# Altium PCB BYS_PCB1_V2.PcbDoc
Units mm, origin at the board's own origin, x right, y up, seen from the top; angles counter-clockwise.
Board outline 76.5 x 95 mm, 2 copper layers (Top Layer, Bottom Layer), stack 1.671 mm thick; 27 components, 35 nets, 119 pads, 551 vias.
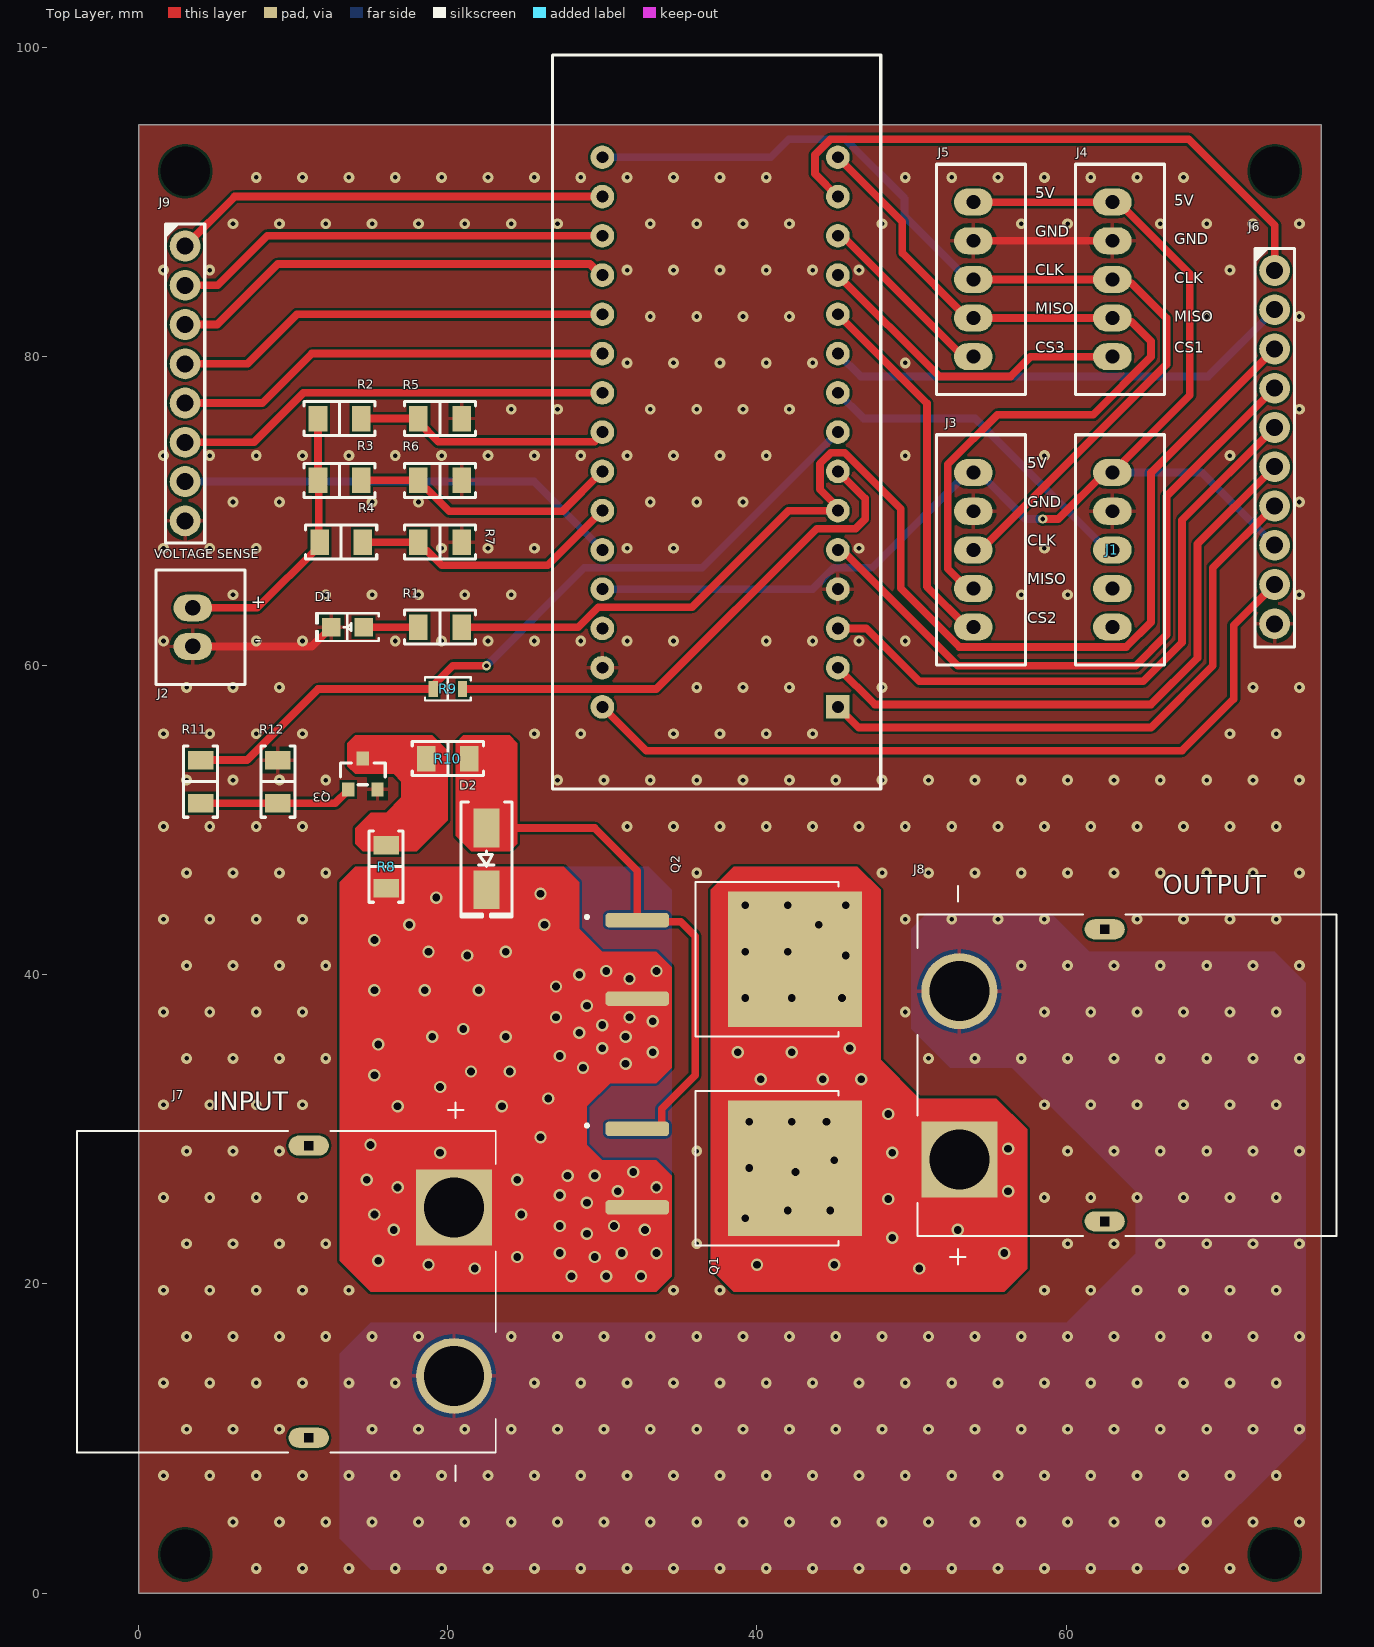
[diagram p0: Top Layer view]
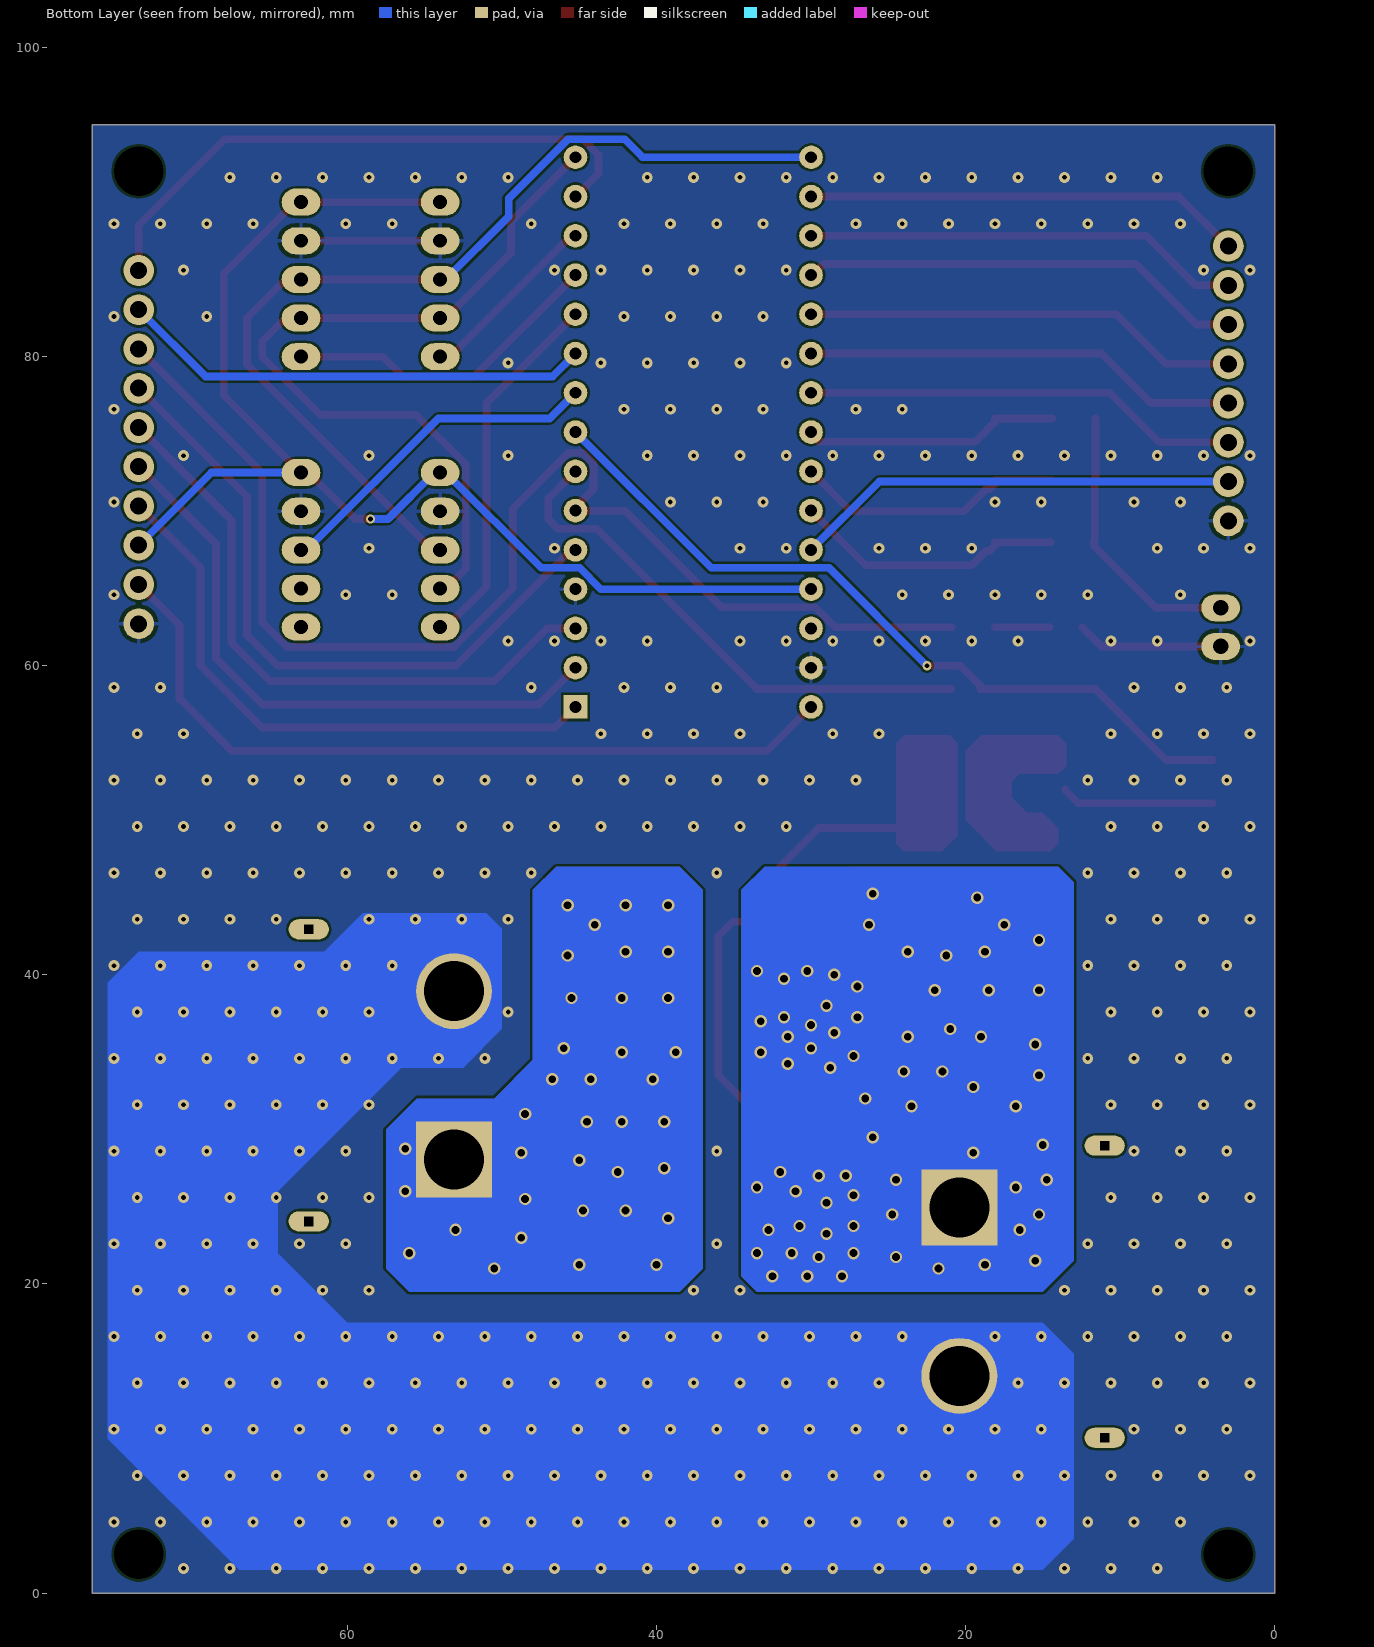
[diagram p1: Bottom Layer view, seen from below]
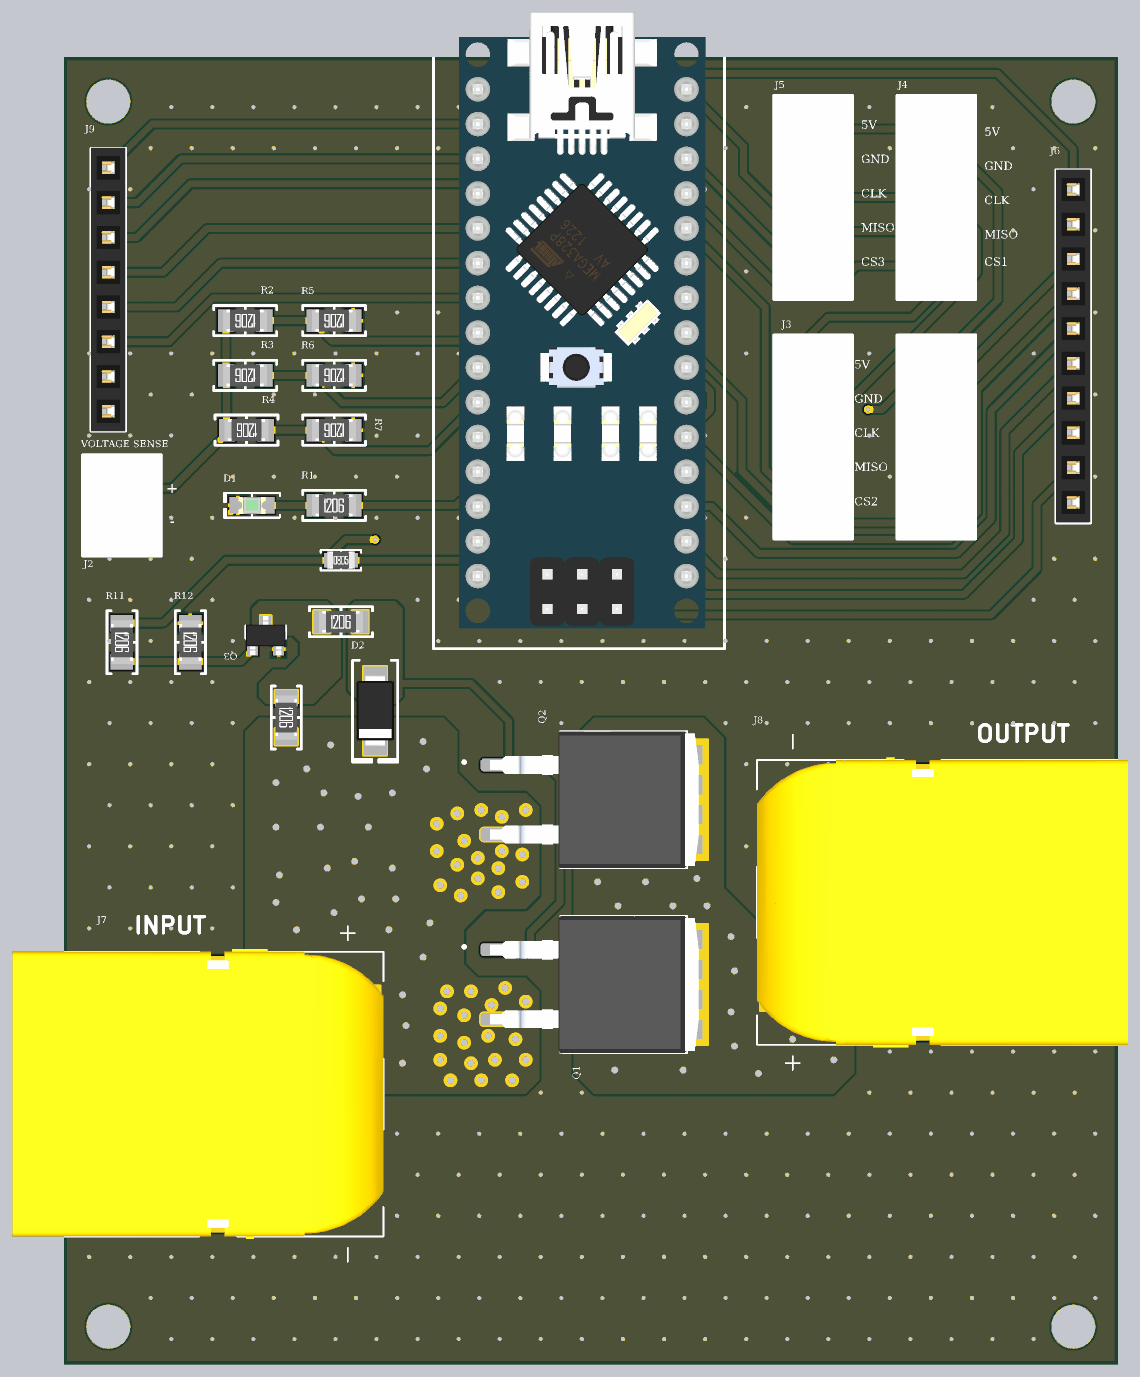
[diagram p2: 3D render of the assembled board from above, using the file's embedded part models]

## Layer stack, top to bottom
Top Solder: solder mask 0.0102, Solder Resist, Dk 3.5
Top Layer: signal copper 0.0356
Dielectric 1: dielectric 1.6, FR-4, Dk 4.8
Bottom Layer: signal copper 0.0356
Bottom Solder: solder mask 0.0102, Solder Resist, Dk 3.5

## Board outline
0,0 0,95 76.5,95 76.5,0

## Design rules (kind name [scope] priority, off if disabled: settings)
Clearance [All] p1: gap=0.152 ignorepadtopadclearanceinfootprint=FALSE
PolygonConnect [All] p1: connectstyle=Relief reliefconductorwidth=0.254 reliefentries=4 polygonreliefangle="90 Angle" airgapwidth=0.254
RoutingVias [All] p1: holewidth=0.3 width=0.6 viastyle="Through Hole" minholewidth=0.3 minwidth=0.4 maxholewidth=1.2 maxwidth=1.2
SolderMaskExpansion [All] p1: expansion=0.102 istentingtop=FALSE
SupplyNets "Schematic Supply Nets_4" [InNet('BAT-')] p1: voltage=0.000
SupplyNets "Schematic Supply Nets_2" [InNet('BAT_SENSE_+')] p2: voltage=0.000
SupplyNets "Schematic Supply Nets" [InNet('+5')] p3: voltage=0.000
Width [All] p1: maxlimit=1 minlimit=0.152 preferedwidth=0.5
30 further rules are at their usual default settings.

## Components (designator, comment, footprint, x,y, rotation, side; value= is the part's Value field where it differs from the comment)
D1 "Green" "LED 0805_2012 GREEN" 13.5,62.5 r180 top
D2 "SMAZ15-TP" "DO214AC SMA" 22.5,47.5 r270 top
IC1 "ArduinoNano" ArduinoNano_3D 46.764,53.276 r90 top
J1 "B5B-XH-A(LF)(SN)" "JST XH B5B-XH-A" 63,67.5 r90 top
J2 "B2B-XH-A(LF)(SN)" "JST XH B2B-XH-A" 3.5,62.5 r90 top
J3 "B5B-XH-A(LF)(SN)" "JST XH B5B-XH-A" 54,67.5 r90 top
J4 "B5B-XH-A(LF)(SN)" "JST XH B5B-XH-A" 63,85 r90 top
J5 "B5B-XH-A(LF)(SN)" "JST XH B5B-XH-A" 54,85 r90 top
J6 "M20-7821042" "HARWIN M20-7821045" 73.5,74.15 r0 top
J7 "SMT XT90 CONNECTOR" XT90_PW-M 11,19.5 r270 top
J8 "SMT XT90 CONNECTOR" XT90_PW-M 62.5,33.5 r90 top
J9 "M20-7820842" "HARWIN M20-7820845" 3,78.27 r0 top
Q1 "PMOS" TO-263-3-2 38.5,27.5 r0 top
Q2 "PMOS" TO-263-3-2 38.5,41 r0 top
Q3 "ZXTN25060BFHTA" "DIODES SOT-23-3" 14.5,53 r90 top
R1 "330 ohm" "RES 1206_3216" 19.5,62.5 r0 top value="0 Ohms"
R2 "0 Ohms" "RES 1206_3216" 13,76 r180 top
R3 "0 Ohms" "RES 1206_3216" 13,72 r180 top
R4 "0 Ohms" "RES 1206_3216" 13.1,68 r180 top
R5 "0 Ohms" "RES 1206_3216" 19.5,76 r180 top
R6 "0 Ohms" "RES 1206_3216" 19.5,72 r180 top
R7 "0 Ohms" "RES 1206_3216" 19.5,68 r180 top
R8 "22 kOhms" "RES 1206_3216" 16,47 r270 top
R9 "0 Ohms" "YAGEO RES RK73 RS73 SG73 0805_2012" 20,58.5 r0 top
R10 "100 Ohms" "RES 1206_3216" 20,54 r0 top
R11 "10 kOhms" "RES 1206_3216" 4,52.5 r270 top
R12 "10 kOhms" "RES 1206_3216" 9,52.5 r270 top

## Footprints (in the part's own frame and the unit in brackets; to place one, negate y for a bottom-side part, rotate by r counter-clockwise, add the part's x,y. Pads: shape width x height; smd on the part's side, far side on the other; paste and mask are expansions set on the pad)
ArduinoNano_3D [mil]
  rect 60x60 hole 30: 0(160,60)
  round 60 hole 30: 1(260,60) 2(360,60) 3(460,60) 4(560,60) 5(660,60) 6(760,60) 7(860,60) 8(960,60) 9(1060,60) 10(1160,60) 11(1260,60) 12(1360,60) 13(1460,60) 14(1560,60) 15(1560,660) 16(1460,660) 17(1360,660) 18(1260,660) 19(1160,660) 20(1060,660) 21(960,660) 22(860,660) 23(760,660) 24(660,660) 25(560,660) 26(460,660) 27(360,660) 28(260,660) 29(160,660)
  silkscreen extent -49,-49 1821,787, body extent 10,6 1781,714, height 496
"DIODES SOT-23-3" [mm] "SOT23, 3-Leads, Body 2.90x2.40mm, Pitch 0.95mm, IPC Medium Density"
  rect 0.9x0.8 smd: 1(-1,0.95) 2(-1,-0.95) 3(1,0)
  silkscreen extent -0.7,-1.45 0.7,1.45, body extent -1.41,-1.45 1.41,1.45, height 1.5
"DO214AC SMA" [mm] "Molded Diode, 2-Leads, Body 4.30x2.60mm, IPC Medium Density"
  rect 2.5x1.7 smd: 1(-2,0) 2(2,0)
  silkscreen extent -3.68,-1.65 3.75,1.65, body extent -2.6,-1.37 2.6,1.37, height 2.4
"HARWIN M20-7820845" [mm] "2.54mm DIL PC TAIL PIN HEADER ASSEMBLY"
  round 2 hole 1.1: 1(0,8.89) 2(0,6.35) 3(0,3.81) 4(0,1.27) 5(0,-1.27) 6(0,-3.81) 7(0,-6.35) 8(0,-8.89)
  silkscreen extent -1.27,-10.33 1.27,10.35, body extent -1.25,-10.36 1.25,10.36, height 8.5
"HARWIN M20-7821045" [mm] "2.54mm DIL PC TAIL PIN HEADER ASSEMBLY"
  round 2 hole 1.1: 1(0,11.43) 2(0,8.89) 3(0,6.35) 4(0,3.81) 5(0,1.27) 6(0,-1.27) 7(0,-3.81) 8(0,-6.35) 9(0,-8.89) 10(0,-11.43)
  silkscreen extent -1.27,-12.93 1.27,12.89, body extent -1.25,-12.9 1.25,12.9, height 8.5
"JST XH B2B-XH-A" [mm]
  oval 1.75x2.5 hole 1: 1(-1.25,0) 2(1.25,0)
  silkscreen extent -3.7,-3.38 3.7,2.38, body extent -3.7,-3.38 3.7,2.38, height 7
"JST XH B5B-XH-A" [mm]
  oval 1.75x2.5 hole 0.9: 1(-5,0) 2(-2.5,0) 3(0,0) 4(2.5,0) 5(5,0)
  silkscreen extent -7.45,-3.38 7.45,2.38, body extent -7.45,-3.38 7.45,2.38, height 7
"LED 0805_2012 GREEN" [mm] "Chip Diode, 2-Leads, Body 2.00x1.25mm, IPC Medium Density"
  rect 1.2x1.2 smd: 1(-1.05,0) 2(1.05,0)
  silkscreen extent -2.03,-0.9 2.03,0.9, body extent -1,-0.62 1,0.63, height 0.9
"RES 1206_3216" [mm] "Chip Resistor, 2-Leads, Body 3.13x1.55mm, IPC Medium Density"
  rect 1.2x1.65 smd: 1(-1.4,0) 2(1.4,0)
  silkscreen extent -2.3,-1.1 2.3,1.1, body extent -1.6,-0.8 1.6,0.8, height 0.6
TO-263-3-2 [mm]
  rrect50% 4.12x0.94 smd: 1(-6.24,2.54) 2(-6.24,-2.54)
  rect 8.68x8.77 smd paste-5: 3(3.96,0)
  silkscreen extent -9.6,-5 6.79,5, body extent -7.63,-5 7.63,5, height 4.5
XT90_PW-M [mm]
  round 4.916 hole 3.9: N(5.45,9.4)
  rect 4.916x4.916 / inner round 4.916 / far side rect 4.916x4.916 hole 3.9: P(-5.45,9.4)
  oval 1.3x2.6 hole 0.6 square: S1(-9.45,0) S2(9.45,0)
  silkscreen extent -12.25,-15 12.25,12.1, body extent -10.6,-15 10.6,12.1, height 10.3
"YAGEO RES RK73 RS73 SG73 0805_2012" [mm] "Chip Resistor, 2-Leads, Body 2.00x1.25mm"
  rect 0.6x1.05 smd: 1(-0.95,0) 2(0.95,0)
  silkscreen extent -1.48,-0.75 1.48,0.75, body extent -1,-0.62 1,0.63, height 0.6

## Part data
D1: library part 597-5311-407NF, "LED GREEN DIFFUSED 0805 SMD", Current - Test=20mA, Device Package="0805 (2012 Metric)", JLCPCB Part Number=C2297, Lens Color=White, manufacturer=Dialight, Millicandela Rating=16mcd, Supplier Device Package=0805, Supplier Part Number 1=350-597-5311-407NFCT-ND, Voltage - Forward (Vf) (Typ)=2.15V, Color=Green, componentlink1description=Datasheet, componentlink1url=https://s3-us-west-2.amazonaws.com/catsy.557/C18701.pdf, componentlink2description="DigiKey Link", componentlink2url=https://www.digikey.com/en/products/detail/dialight/597-5311-407NF/21710538, Height (Max)=0.93mm, lastupdated="3.06.2024 20:00:23", Lens Size="1.30mm x 1.25mm", Lens Style="Rectangle with Flat Top", Lens Transparency=Diffused, Lifecycle Status=Active, Minimum Order=1, Mounting Type="Surface Mount", Package / Case="0805 (2012 Metric)", packaging=TapeAndReel, Part Number=597-5311-407NF, partid=1475, price=0.08, series=597, Size / Dimension="2.00mm L x 1.25mm W", Supplier 1=DigiKey, Viewing Angle=140°, Wavelength - Dominant=562nm
D2: "DIODE ZENER 15V 1W DO214AC", Current - Reverse Leakage @ Vr="1 µA @ 11.4 V", JLCPCB Part Number=C110524, manufacturer="Micro Commercial Co", Operating Temperature="-65°C ~ 150°C", Package / Case="DO-214AC, SMA", Power - Max="1 W", Supplier Device Package="DO-214AC (SMAJ)", Supplier Part Number 1=SMAZ15-TPMSCT-ND, Tolerance=±5%, Voltage - Forward (Vf) (Max) @ If="1.2 V @ 200 mA", Voltage - Zener (Nom) (Vz)="15 V", componentlink1description=Datasheet, componentlink1url=https://www.mccsemi.com/pdf/Products/SMAZ5V1%20-%20SMAZ39(DO-214AC).pdf, componentlink2description="DigiKey Link", componentlink2url=https://www.digikey.com/en/products/detail/micro-commercial-co/SMAZ15-TP/1793256, lastupdated="3.06.2024 19:55:30", Lifecycle Status=Active, Minimum Order=1, Mounting Type="Surface Mount", packaging=TapeAndReel, Part Number=SMAZ15-TP, Part Status=Active, partid=1156, price=0.05, series=-, Supplier 1=DigiKey, Impedance (Max) (Zzt)="10 Ohms"
IC1: "ArduinoNano 3D"
J1 J3 J4 J5: "CONN HEADER VERT 5POS 2.5MM", Current Rating (Amps)=3A, JLCPCB Part Number=C157991, manufacturer="JST Sales America Inc.", Material Flammability Rating="UL94 V-0", Operating Temperature="-25°C ~ 85°C", Supplier Part Number 1=455-2270-ND, Voltage Rating=250V, Insulation Color=Natural, componentlink1description=Datasheet, componentlink1url=http://www.jst-mfg.com/product/pdf/eng/eXH.pdf, componentlink2description="DigiKey Link", componentlink2url=http://digikey.com/product-detail/en/jst-sales-america-inc/B5B-XH-A-LF-SN/455-2270-ND/1530483, Connector Type=Header, Contact Finish - Mating=Tin, Contact Finish - Post=Tin, Contact Length - Post="0.134\" (3.40mm)", Contact Material=Brass, Contact Shape=Square, Contact Type="Male Pin", Fastening Type="Detent Lock", lastupdated="12.01.2020 23:46:46", Lifecycle Status=Active, Minimum Order=1, Mounting Type="Through Hole", Number of Positions=5, Number of Positions Loaded=All, Number of Rows=1, packaging=Bulk, Part Number=B5B-XH-A(LF)(SN), Part Status=Active, partid=70, Pitch - Mating="0.098\" (2.50mm)", price=0.25, series=XH, Shrouding="Shrouded - 4 Wall", Style="Board to Cable/Wire", Supplier 1=DigiKey, Termination="Press-Fit, Solder", Insulation Height="0.276\" (7.00mm)", Insulation Material="Polyamide (PA66), Nylon 6/6"
J2: "CONN HEADER VERT 2POS 2.5MM", Current Rating (Amps)=3A, JLCPCB Part Number=C2908600, manufacturer="JST Sales America Inc.", Material Flammability Rating="UL94 V-0", Operating Temperature="-25°C ~ 85°C", Supplier Part Number 1=455-2247-ND, Voltage Rating=250V, Insulation Color=Natural, componentlink1description=Datasheet, componentlink1url=http://www.jst-mfg.com/product/pdf/eng/eXH.pdf, componentlink2description="DigiKey Link", componentlink2url=http://digikey.com/product-detail/en/jst-sales-america-inc/B2B-XH-A-LF-SN/455-2247-ND/1651045, Connector Type=Header, Contact Finish - Mating=Tin, Contact Finish - Post=Tin, Contact Length - Post="0.134\" (3.40mm)", Contact Material=Brass, Contact Shape=Square, Contact Type="Male Pin", Fastening Type="Detent Lock", lastupdated="12.01.2020 23:46:08", Lifecycle Status=Active, Minimum Order=1, Mounting Type="Through Hole", Number of Positions=2, Number of Positions Loaded=All, Number of Rows=1, packaging=Bulk, Part Number=B2B-XH-A(LF)(SN), Part Status=Active, partid=67, Pitch - Mating="0.098\" (2.50mm)", price=0.15, series=XH, Shrouding="Shrouded - 4 Wall", Style="Board to Cable/Wire", Supplier 1=DigiKey, Termination="Press-Fit, Solder", Insulation Height="0.276\" (7.00mm)", Insulation Material="Polyamide (PA66), Nylon 6/6"
J6: "CONN RCPT 10POS 0.1 GOLD PCB", Current Rating (Amps)=3A, manufacturer="Harwin Inc.", Material Flammability Rating="UL94 V-0", Operating Temperature="-40°C ~ 105°C", Supplier Part Number 1=952-1846-ND, Insulation Color=Black, componentlink1description=Datasheet, componentlink1url=https://cdn.harwin.com/pdfs/Harwin_PC_Connectors_M20.pdf, componentlink2description="DigiKey Link", componentlink2url=http://digikey.com/product-detail/en/harwin-inc/M20-7821042/952-1846-ND/3727813, Connector Type=Receptacle, Contact Finish - Mating=Gold, Contact Finish - Post=Tin, Contact Finish Thickness - Mating=Flash, Contact Length - Post="0.118\" (3.00mm)", Contact Type="Female Socket", Fastening Type=Push-Pull, lastupdated="21.09.2022 18:59:03", Lifecycle Status=Active, Mated Stacking Heights="11.04mm, 12.63mm", Minimum Order=1, Mounting Type="Through Hole", Number of Positions=10, Number of Positions Loaded=All, Number of Rows=1, packaging=Tube, Part Number=M20-7821042, Part Status=Active, Pitch - Mating="0.100\" (2.54mm)", price=1.39, series=M20, Style="Board to Board or Cable", Supplier 1=DigiKey, Termination=Solder, Insulation Height="0.335\" (8.51mm)"
J7 J8: library part XT90_PW-M, JLCPCB Part Number=C3040689
J9: "CONN RCPT 8POS 0.1 GOLD PCB", Current Rating (Amps)=3A, manufacturer="Harwin Inc.", Material Flammability Rating="UL94 V-0", Operating Temperature="-40°C ~ 105°C", Supplier Part Number 1=952-1823-ND, Insulation Color=Black, componentlink1description=Datasheet, componentlink1url=https://cdn.harwin.com/pdfs/C001XX_M20_Series_Connectors.pdf, componentlink2description="DigiKey Link", componentlink2url=https://www.digikey.com/en/products/detail/harwin-inc/M20-7820842/3727790, Connector Type=Receptacle, Contact Finish - Mating=Gold, Contact Finish - Post=Tin, Contact Finish Thickness - Mating=Flash, Contact Length - Post="0.118\" (3.00mm)", Contact Type="Female Socket", Fastening Type=Push-Pull, lastupdated="21.09.2022 18:58:33", Lifecycle Status=Active, Mated Stacking Heights="11.04mm, 12.63mm", Minimum Order=1, Mounting Type="Through Hole", Number of Positions=8, Number of Positions Loaded=All, Number of Rows=1, packaging=Tube, Part Number=M20-7820842, Part Status=Active, Pitch - Mating="0.100\" (2.54mm)", price=0.62, series=M20, Style="Board to Board or Cable", Supplier 1=DigiKey, Termination=Solder, Insulation Height="0.335\" (8.51mm)"
Q1 Q2: JLCPCB Part Number=C2909634
Q3: "TRANS NPN 60V 3.5A SOT23-3", Current - Collector (Ic) (Max)="3.5 A", Current - Collector Cutoff (Max)="50nA (ICBO)", DC Current Gain (hFE) (Min) @ Ic, Vce="100 @ 10mA, 2V", Frequency - Transition=185MHz, JLCPCB Part Number=C2145, manufacturer="Diodes Incorporated", Operating Temperature="-55°C ~ 150°C (TJ)", Package / Case="TO-236-3, SC-59, SOT-23-3", Power - Max="1.25 W", Supplier Device Package=SOT-23-3, Supplier Part Number 1=ZXTN25060BFHCT-ND, Voltage - Collector Emitter Breakdown (Max)="60 V", componentlink1description=Datasheet, componentlink1url=https://www.diodes.com/assets/Datasheets/ZXTN25060BFH.pdf, componentlink2description="DigiKey Link", componentlink2url=https://www.digikey.com/en/products/detail/diodes-incorporated/ZXTN25060BFHTA/1043597, lastupdated="3.06.2024 20:24:10", Lifecycle Status=Active, Minimum Order=1, Mounting Type="Surface Mount", packaging=TapeAndReel, Part Number=ZXTN25060BFHTA, Part Status=Active, partid=49, price=0.19, series=-, Supplier 1=DigiKey, Transistor Type=NPN, Vce Saturation (Max) @ Ib, Ic="175mV @ 350mA, 3.5A"
R1: library part CRG1206ZR, "RES SMD 0 OHM JUMPER 1/4W 1206", Device Package="1206 (3216 Metric)", manufacturer="TE Connectivity Passive Product", Operating Temperature="-55°C ~ 155°C", Power (Watts)="0.25W, 1/4W", Resistance="0 Ohms", Supplier Device Package=1206, Supplier Part Number 1=A106079CT-ND, Tolerance=Jumper, componentlink1description=Datasheet, componentlink1url=https://www.te.com/commerce/DocumentDelivery/DDEController?Action=srchrtrv&DocNm=1773204&DocType=DS&DocLang=English, componentlink2description="DigiKey Link", componentlink2url=https://www.digikey.com/en/products/detail/te-connectivity-passive-product/CRG1206ZR/2055692, Composition="Thick Film", Height - Seated (Max)="0.026\" (0.65mm)", lastupdated="9.02.2024 20:54:45", Lifecycle Status=Active, Minimum Order=1, Number of Terminations=2, Package / Case="1206 (3216 Metric)", packaging=TapeAndReel, Part Number=CRG1206ZR, Part Status=Active, partid=26975, price=0.01, series="CRG, Neohm", Size / Dimension="0.122\" L x 0.061\" W (3.10mm x 1.55mm)", Supplier 1=DigiKey
R2: library part CRG1206ZR, "RES SMD 0 OHM JUMPER 1/4W 1206", Device Package="1206 (3216 Metric)", JLCPCB Part Number=C17900, manufacturer="TE Connectivity Passive Product", Operating Temperature="-55°C ~ 155°C", Power (Watts)="0.25W, 1/4W", Supplier Device Package=1206, Supplier Part Number 1=A106079CT-ND, Tolerance=Jumper, componentlink1description=Datasheet, componentlink1url=https://www.te.com/commerce/DocumentDelivery/DDEController?Action=srchrtrv&DocNm=1773204&DocType=DS&DocLang=English, componentlink2description="DigiKey Link", componentlink2url=https://www.digikey.com/en/products/detail/te-connectivity-passive-product/CRG1206ZR/2055692, Composition="Thick Film", Height - Seated (Max)="0.026\" (0.65mm)", lastupdated="9.02.2024 20:54:45", Lifecycle Status=Active, Minimum Order=1, Number of Terminations=2, Package / Case="1206 (3216 Metric)", packaging=TapeAndReel, Part Number=CRG1206ZR, Part Status=Active, partid=26975, price=0.01, Resistance="0 Ohms", series="CRG, Neohm", Size / Dimension="0.122\" L x 0.061\" W (3.10mm x 1.55mm)", Supplier 1=DigiKey
R3 R4 R6 R7: library part CRG1206ZR, "RES SMD 0 OHM JUMPER 1/4W 1206", Device Package="1206 (3216 Metric)", manufacturer="TE Connectivity Passive Product", Operating Temperature="-55°C ~ 155°C", Power (Watts)="0.25W, 1/4W", Supplier Device Package=1206, Supplier Part Number 1=A106079CT-ND, Tolerance=Jumper, componentlink1description=Datasheet, componentlink1url=https://www.te.com/commerce/DocumentDelivery/DDEController?Action=srchrtrv&DocNm=1773204&DocType=DS&DocLang=English, componentlink2description="DigiKey Link", componentlink2url=https://www.digikey.com/en/products/detail/te-connectivity-passive-product/CRG1206ZR/2055692, Composition="Thick Film", Height - Seated (Max)="0.026\" (0.65mm)", lastupdated="9.02.2024 20:54:45", Lifecycle Status=Active, Minimum Order=1, Number of Terminations=2, Package / Case="1206 (3216 Metric)", packaging=TapeAndReel, Part Number=CRG1206ZR, Part Status=Active, partid=26975, price=0.01, Resistance="0 Ohms", series="CRG, Neohm", Size / Dimension="0.122\" L x 0.061\" W (3.10mm x 1.55mm)", Supplier 1=DigiKey
R5: library part CRG1206ZR, "RES SMD 0 OHM JUMPER 1/4W 1206", Device Package="1206 (3216 Metric)", JLCPCB Part Number=C17902, manufacturer="TE Connectivity Passive Product", Operating Temperature="-55°C ~ 155°C", Power (Watts)="0.25W, 1/4W", Supplier Device Package=1206, Supplier Part Number 1=A106079CT-ND, Tolerance=Jumper, componentlink1description=Datasheet, componentlink1url=https://www.te.com/commerce/DocumentDelivery/DDEController?Action=srchrtrv&DocNm=1773204&DocType=DS&DocLang=English, componentlink2description="DigiKey Link", componentlink2url=https://www.digikey.com/en/products/detail/te-connectivity-passive-product/CRG1206ZR/2055692, Composition="Thick Film", Height - Seated (Max)="0.026\" (0.65mm)", lastupdated="9.02.2024 20:54:45", Lifecycle Status=Active, Minimum Order=1, Number of Terminations=2, Package / Case="1206 (3216 Metric)", packaging=TapeAndReel, Part Number=CRG1206ZR, Part Status=Active, partid=26975, price=0.01, Resistance="0 Ohms", series="CRG, Neohm", Size / Dimension="0.122\" L x 0.061\" W (3.10mm x 1.55mm)", Supplier 1=DigiKey
R8: library part ERA-8ARB223V, "RES SMD 22K OHM 0.1% 1/4W 1206", Device Package="1206 (3216 Metric)", JLCPCB Part Number=C18003, manufacturer="Panasonic Electronic Components", Operating Temperature="-55°C ~ 155°C", Power (Watts)="0.25W, 1/4W", Ratings=AEC-Q200, Supplier Device Package=1206, Supplier Part Number 1=P22KCSCT-ND, Temperature Coefficient=±10ppm/°C, Tolerance=±0.1%, componentlink1description=Datasheet, componentlink1url=https://industrial.panasonic.com/cdbs/www-data/pdf/RDM0000/AOA0000C307.pdf, componentlink2description="DigiKey Link", componentlink2url=https://www.digikey.com/en/products/detail/panasonic-electronic-components/ERA-8ARB223V/5141094, Composition="Thin Film", Features="Automotive AEC-Q200", Height - Seated (Max)="0.028\" (0.70mm)", lastupdated="9.02.2024 20:53:41", Lifecycle Status=Active, Minimum Order=1, Number of Terminations=2, Package / Case="1206 (3216 Metric)", packaging=TapeAndReel, Part Number=ERA-8ARB223V, Part Status=Active, partid=43618, price=0.37, Resistance="22 kOhms", series=ERA-8A, Size / Dimension="0.126\" L x 0.063\" W (3.20mm x 1.60mm)", Supplier 1=DigiKey
R9: library part RK73Z2ATTED, "RESISTOR", Device Package="0805 (2012 Metric)", manufacturer="KOA Speer Electronics, Inc.", Operating Temperature="-55°C ~ 155°C", Ratings=AEC-Q200, Supplier Device Package=0805, Supplier Part Number 1=2019-RK73Z2ATTEDCT-ND, Tolerance=Jumper, componentlink1description=Datasheet, componentlink1url=https://www.koaspeer.com/pdfs/RK73Z.pdf, componentlink2description="DigiKey Link", componentlink2url=https://www.digikey.com/en/products/detail/koa-speer-electronics-inc/RK73Z2ATTED/21679892, Composition="Thick Film", Features="Automotive AEC-Q200", Height - Seated (Max)="0.024\" (0.60mm)", lastupdated="25.07.2024 09:45:07", Lifecycle Status=Active, Minimum Order=1, Number of Terminations=2, Package / Case="0805 (2012 Metric)", packaging=TapeAndReel, Part Number=RK73Z2ATTED, partid=90035, price=0.01, Resistance="0 Ohms", series=RK73Z, Size / Dimension="0.079\" L x 0.049\" W (2.00mm x 1.25mm)", Supplier 1=DigiKey
R10: library part SG73P2BTTD101J, "RES 100 OHM 5% 3/4W 1206", Device Package="1206 (3216 Metric)", JLCPCB Part Number=C17901, manufacturer="KOA Speer Electronics, Inc.", Operating Temperature="-55°C ~ 155°C", Power (Watts)="0.75W, 3/4W", Ratings=AEC-Q200, Supplier Device Package=1206, Supplier Part Number 1=2019-SG73P2BTTD101JCT-ND, Temperature Coefficient=±200ppm/°C, Tolerance=±5%, componentlink1description=Datasheet, componentlink1url=https://www.koaspeer.com/pdfs/SG73P.pdf, componentlink2description="DigiKey Link", componentlink2url=https://www.digikey.com/en/products/detail/koa-speer-electronics-inc/SG73P2BTTD101J/10192996, Composition="Thick Film", Features="Automotive AEC-Q200, Pulse Withstanding", Height - Seated (Max)="0.028\" (0.70mm)", lastupdated="9.02.2024 20:53:01", Lifecycle Status=Active, Minimum Order=1, Number of Terminations=2, Package / Case="1206 (3216 Metric)", packaging=TapeAndReel, Part Number=SG73P2BTTD101J, Part Status=Active, partid=72283, price=0.02, Resistance="100 Ohms", series=SG73P, Size / Dimension="0.126\" L x 0.063\" W (3.20mm x 1.60mm)", Supplier 1=DigiKey
R11 R12: library part RN73H2BTTD1002B10, "RES 10K OHM 0.1% 1/4W 1206", Device Package="1206 (3216 Metric)", JLCPCB Part Number=C17902, manufacturer="KOA Speer Electronics, Inc.", Operating Temperature="-55°C ~ 155°C", Power (Watts)="0.25W, 1/4W", Ratings=AEC-Q200, Supplier Device Package=1206, Supplier Part Number 1=2019-RN73H2BTTD1002B10CT-ND, Temperature Coefficient=±10ppm/°C, Tolerance=±0.1%, componentlink1description=Datasheet, componentlink1url=http://www.koaspeer.com/catimages/Products/RN73H/RN73H.pdf, componentlink2description="DigiKey Link", componentlink2url=https://www.digikey.com/en/products/detail/koa-speer-electronics-inc/RN73H2BTTD1002B10/10064203, Composition="Metal Film", Features="Automotive AEC-Q200, Moisture Resistant", Height - Seated (Max)="0.028\" (0.70mm)", lastupdated="9.02.2024 20:53:56", Lifecycle Status=Active, Minimum Order=1, Number of Terminations=2, Package / Case="1206 (3216 Metric)", packaging=TapeAndReel, Part Number=RN73H2BTTD1002B10, Part Status=Active, partid=40038, price=0.33, Resistance="10 kOhms", series=RN73H, Size / Dimension="0.126\" L x 0.063\" W (3.20mm x 1.60mm)", Supplier 1=DigiKey

## Free pads (board coordinates)
  round 1.4 hole 3.2: 27(3,2.5) 27(3,92) 27(73.5,2.5) 27(73.5,92)

## Via types
v1: diameter 0.7, hole 0.3, Top Layer to Bottom Layer, tented both sides, 443 vias
v2: diameter 0.8, hole 0.5, Top Layer to Bottom Layer, tented top, 36 vias
v3: diameter 0.8, hole 0.5, Top Layer to Bottom Layer, tented both sides, 35 vias
v4: diameter 0.8, hole 0.5, Top Layer to Bottom Layer, 35 vias
v5: diameter 0.6, hole 0.3, Top Layer to Bottom Layer, 2 vias

## Nets (pads, with @x,y where several pads share a name; then routed paths per layer and width w, separated by ;. In a path a pad name is that pad's centre, name@x,y a point inside that pad or via, vN(x,y) a via of type N, cw(c..) or ccw(c..) an arc to the next point about the centre after c; other vN are vias at no path point)
3.3V: IC1.16 J9.1 | length 28.3
  Top Layer w0.5: J9.1 6.2,90.36 IC1.16
+5: IC1.26 J1.5 J3.5 J4.5 J5.5 J6.8 | length 81.9
  Top Layer w0.5: J5.5 J4.5 63.375,90 68,85.375 68,77.5 63.614,73.114 63.614,73.077 J1.5@63.037,72.5 ; v5(58.5,69.5) 59.5,69.5 62.5,72.5 J1.5
  Bottom Layer w0.5: IC1.26 43.593,64.96 44.969,66.336 47.461,66.336 53.625,72.5 54.375,72.5 57.375,69.5 v5(58.5,69.5) ; J1.5 68.8,72.5 J6.8
A0: IC1.22 R2.1 R5.2 | length 16.5
  Top Layer w0.381: 29.5,74.5 30,75 IC1.22
  Top Layer w0.5: R2.1 R5.2 ; R5.2@18.1,75.775 19.375,74.5 29.5,74.5
A1: IC1.23 R3.1 R6.2 | length 17.6
  Top Layer w0.5: R3.1 R6.2 18.1,71.775 18.45,71.425 18.675,71.425 20.1,70 27.42,70 IC1.23
A2: IC1.24 R4.1 R7.2 | length 17.7
  Top Layer w0.5: R4.1 R7.2 18.1,67.775 18.45,67.425 18.675,67.425 19.6,66.5 26.46,66.5 IC1.24
A3: IC1.25 J9.7 | length 28.8
  Bottom Layer w0.5: J9.7 25.58,71.92 IC1.25
A4: IC1.21 J9.6 | length 28.3
  Top Layer w0.5: J9.6 7.46,74.46 10.66,77.66 IC1.21
A5: IC1.20 J9.5 | length 28.3
  Top Layer w0.5: J9.5 8,77 11.2,80.2 IC1.20
A6: IC1.19 J9.4 | length 28.3
  Top Layer w0.5: J9.4 7.04,79.54 10.24,82.74 IC1.19
A7: IC1.18 J9.3 | length 28.9
  Top Layer w0.5: J9.3 5.08,82.08 9,86 29.195,86 29.915,85.28 IC1.18
BASE_D: IC1.7 R9.1 R11.1 | length 50.2
  Top Layer w0.5: R11.1 7.006,53.9 11.606,58.5 R9.1 19.05,58.725 20.325,60 v5(22.5,60)
  Bottom Layer w0.5: v5(22.5,60) 28.836,66.336 36.456,66.336 IC1.7
BAT+: D2.2 J7.P Q1.2 Q2.2 R8.2
  other v3: 21.75,21 18.75,21.25 15.5,21.5 24.5,21.75 16.5,23.5 15.25,24.5 24.75,24.5 16.75,26.25 14.75,26.75 24.5,26.75 19.5,28.5 15,29 26,29.5 16.75,31.5 23.5,31.5 26.5,32 19.5,32.75 15.25,33.5 21.5,33.75 24,33.75 15.5,35.5 19,36 23.75,36 21,36.5 15.25,39 18.5,39 22,39 21.25,41.25 18.75,41.5 23.75,41.5 15.25,42.25 17.5,43.25 26.25,43.25 19.25,45 26,45.25
  other v4: 28,20.5 30.25,20.5 32.5,20.5 29.5,21.75 27.25,22 31.25,22 33.5,22 29,23.25 32.75,23.5 27.25,23.75 30.75,23.75 29,25.25 27.25,25.75 31,26 33.5,26.25 27.75,27 29.5,27 32,27.25 28.75,34 31.5,34.25 27.25,34.75 33.25,35 30,35.25 31.5,36 28.5,36.25 30,36.75 33.25,37 27,37.25 31.75,37.25 29,38 27,39.25 31.75,39.75 28.5,40 30.25,40.25 33.5,40.25
BAT-: D1.2 IC1.3 IC1.28 J1.4 J2.1 J3.4 J4.4 J5.4 J6.10 J7.N J8.N J9.8 Q3.2 R5.1 R6.1 R7.1 R12.1 | length 18.5
  Top Layer w0.5: J2.1 11.2,61.25 D1.2 ; J5.4 J4.4
  other v1: 7.6,1.6 10.6,1.6 13.6,1.6 16.6,1.6 19.6,1.6 22.6,1.6 25.6,1.6 28.6,1.6 31.6,1.6 34.6,1.6 37.6,1.6 40.6,1.6 43.6,1.6 46.6,1.6 49.6,1.6 52.6,1.6 55.6,1.6 58.6,1.6 61.6,1.6 64.6,1.6 67.6,1.6 70.6,1.6 6.1,4.6 9.1,4.6 12.1,4.6 15.1,4.6 18.1,4.6 21.1,4.6 24.1,4.6 27.1,4.6 30.1,4.6 33.1,4.6 36.1,4.6 39.1,4.6 42.1,4.6 45.1,4.6 48.1,4.6 51.1,4.6 54.1,4.6 57.1,4.6 60.1,4.6 63.1,4.6 66.1,4.6 69.1,4.6 72.1,4.6 75.1,4.6 1.6,7.6 4.6,7.6 7.6,7.6 10.6,7.6 13.6,7.6 16.6,7.6 19.6,7.6 22.6,7.6 25.6,7.6 28.6,7.6 31.6,7.6 34.6,7.6 37.6,7.6 40.6,7.6 43.6,7.6 46.6,7.6 49.6,7.6 52.6,7.6 55.6,7.6 58.6,7.6 61.6,7.6 64.6,7.6 67.6,7.6 70.6,7.6 73.6,7.6 3.1,10.6 6.1,10.6 9.1,10.6 15.1,10.6 18.1,10.6 21.1,10.6 24.1,10.6 27.1,10.6 30.1,10.6 33.1,10.6 36.1,10.6 39.1,10.6 42.1,10.6 45.1,10.6 48.1,10.6 51.1,10.6 54.1,10.6 57.1,10.6 60.1,10.6 63.1,10.6 66.1,10.6 69.1,10.6 72.1,10.6 75.1,10.6 1.6,13.6 4.6,13.6 7.6,13.6 10.6,13.6 13.6,13.6 16.6,13.6 25.6,13.6 28.6,13.6 31.6,13.6 34.6,13.6 37.6,13.6 40.6,13.6 43.6,13.6 46.6,13.6 49.6,13.6 52.6,13.6 55.6,13.6 58.6,13.6 61.6,13.6 64.6,13.6 67.6,13.6 70.6,13.6 73.6,13.6 3.1,16.6 6.1,16.6 9.1,16.6 12.1,16.6 15.1,16.6 18.1,16.6 24.1,16.6 27.1,16.6 30.1,16.6 33.1,16.6 36.1,16.6 39.1,16.6 42.1,16.6 45.1,16.6 48.1,16.6 51.1,16.6 54.1,16.6 57.1,16.6 60.1,16.6 63.1,16.6 66.1,16.6 69.1,16.6 72.1,16.6 75.1,16.6 1.6,19.6 4.6,19.6 7.6,19.6 10.6,19.6 13.6,19.6 34.6,19.6 37.6,19.6 58.6,19.6 61.6,19.6 64.6,19.6 67.6,19.6 70.6,19.6 73.6,19.6 3.1,22.6 6.1,22.6 9.1,22.6 12.1,22.6 36.1,22.6 60.1,22.6 63.1,22.6 66.1,22.6 69.1,22.6 72.1,22.6 75.1,22.6 1.6,25.6 4.6,25.6 7.6,25.6 10.6,25.6 58.6,25.6 61.6,25.6 64.6,25.6 67.6,25.6 70.6,25.6 73.6,25.6 3.1,28.6 6.1,28.6 9.1,28.6 36.1,28.6 60.1,28.6 63.1,28.6 66.1,28.6 69.1,28.6 72.1,28.6 75.1,28.6 1.6,31.6 4.6,31.6 7.6,31.6 10.6,31.6 58.6,31.6 61.6,31.6 64.6,31.6 67.6,31.6 70.6,31.6 73.6,31.6 3.1,34.6 6.1,34.6 9.1,34.6 12.1,34.6 51.1,34.6 54.1,34.6 57.1,34.6 60.1,34.6 63.1,34.6 66.1,34.6 69.1,34.6 72.1,34.6 75.1,34.6 1.6,37.6 4.6,37.6 7.6,37.6 10.6,37.6 49.6,37.6 58.6,37.6 61.6,37.6 64.6,37.6 67.6,37.6 70.6,37.6 73.6,37.6 3.1,40.6 6.1,40.6 9.1,40.6 12.1,40.6 57.1,40.6 60.1,40.6 63.1,40.6 66.1,40.6 69.1,40.6 72.1,40.6 75.1,40.6 1.6,43.6 4.6,43.6 7.6,43.6 10.6,43.6 49.6,43.6 52.6,43.6 55.6,43.6 58.6,43.6 64.6,43.6 67.6,43.6 70.6,43.6 73.6,43.6 3.1,46.6 6.1,46.6 9.1,46.6 12.1,46.6 36.1,46.6 48.1,46.6 51.1,46.6 54.1,46.6 57.1,46.6 60.1,46.6 63.1,46.6 66.1,46.6 69.1,46.6 72.1,46.6 75.1,46.6 1.6,49.6 4.6,49.6 7.6,49.6 10.6,49.6 31.6,49.6 34.6,49.6 37.6,49.6 40.6,49.6 43.6,49.6 46.6,49.6 49.6,49.6 52.6,49.6 55.6,49.6 58.6,49.6 61.6,49.6 64.6,49.6 67.6,49.6 70.6,49.6 73.6,49.6 3.1,52.6 6.1,52.6 9.1,52.6 12.1,52.6 27.1,52.6 30.1,52.6 33.1,52.6 36.1,52.6 39.1,52.6 42.1,52.6 45.1,52.6 48.1,52.6 51.1,52.6 54.1,52.6 57.1,52.6 60.1,52.6 63.1,52.6 66.1,52.6 69.1,52.6 72.1,52.6 75.1,52.6 1.6,55.6 4.6,55.6 7.6,55.6 10.6,55.6 25.6,55.6 28.6,55.6 34.6,55.6 37.6,55.6 40.6,55.6 43.6,55.6 70.6,55.6 73.6,55.6 3.1,58.6 6.1,58.6 9.1,58.6 36.1,58.6 39.1,58.6 42.1,58.6 48.1,58.6 72.1,58.6 75.1,58.6 1.6,61.6 7.6,61.6 10.6,61.6 16.6,61.6 19.6,61.6 22.6,61.6 25.6,61.6 28.6,61.6 31.6,61.6 34.6,61.6 40.6,61.6 43.6,61.6 46.6,61.6 49.6,61.6 6.1,64.6 12.1,64.6 15.1,64.6 18.1,64.6 21.1,64.6 24.1,64.6 57.1,64.6 60.1,64.6 75.1,64.6 1.6,67.6 4.6,67.6 7.6,67.6 19.6,67.6 22.6,67.6 25.6,67.6 31.6,67.6 34.6,67.6 46.6,67.6 58.6,67.6 6.1,70.6 9.1,70.6 15.1,70.6 18.1,70.6 33.1,70.6 36.1,70.6 39.1,70.6 75.1,70.6 1.6,73.6 4.6,73.6 7.6,73.6 10.6,73.6 13.6,73.6 16.6,73.6 19.6,73.6 22.6,73.6 25.6,73.6 28.6,73.6 31.6,73.6 34.6,73.6 37.6,73.6 40.6,73.6 49.6,73.6 58.6,73.6 70.6,73.6 24.1,76.6 27.1,76.6 33.1,76.6 36.1,76.6 39.1,76.6 42.1,76.6 75.1,76.6 31.6,79.6 34.6,79.6 37.6,79.6 40.6,79.6 43.6,79.6 49.6,79.6 33.1,82.6 36.1,82.6 39.1,82.6 42.1,82.6 69.1,82.6 75.1,82.6 1.6,85.6 4.6,85.6 31.6,85.6 34.6,85.6 37.6,85.6 40.6,85.6 43.6,85.6 46.6,85.6 70.6,85.6 6.1,88.6 9.1,88.6 12.1,88.6 15.1,88.6 18.1,88.6 21.1,88.6 24.1,88.6 27.1,88.6 33.1,88.6 36.1,88.6 39.1,88.6 42.1,88.6 48.1,88.6 57.1,88.6 60.1,88.6 66.1,88.6 69.1,88.6 72.1,88.6 75.1,88.6 7.6,91.6 10.6,91.6 13.6,91.6 16.6,91.6 19.6,91.6 22.6,91.6 25.6,91.6 28.6,91.6 31.6,91.6 34.6,91.6 37.6,91.6 40.6,91.6 49.6,91.6 52.6,91.6 55.6,91.6 58.6,91.6 61.6,91.6 64.6,91.6 67.6,91.6
BAT_SENSE_+: J2.2 R2.2 R3.2 R4.2 | length 18.1
  Top Layer w0.5: J2.2 7.675,63.75 11.7,67.775 R4.2 11.65,68.05 11.65,71.95 R3.2 R2.2
D2: IC1.4 J6.4 | length 44.1
  Top Layer w0.5: IC1.4 45.5,67.5 53,60 64.5,60 66.5,62 66.5,70.96 J6.4
D3: IC1.5 J6.3 R1.2 | length 82.6
  Top Layer w0.5: R1.2 28.433,62.5 29.729,63.796 35.796,63.796 42.04,70.04 IC1.5 45.24,70.26 44.076,71.424 44.076,73.062 44.79,73.776 45.69,73.776 49.303,70.163 49.303,65.015 53.096,61.223 63.904,61.223 65.5,62.818 65.5,72.5 J6.3
D6: IC1.8 J1.3 | length 22
  Bottom Layer w0.5: IC1.8 46.9,76 54.125,76 62.625,67.5 J1.3
D7: IC1.9 J6.2 | length 30.7
  Bottom Layer w0.5: IC1.9 46.717,78.723 69.183,78.723 J6.2
D11: IC1.13 J6.1 | length 38.7
  Top Layer w0.5: IC1.13 43.757,91.843 43.757,93.064 44.758,94.064 67.936,94.064 73.5,88.5 J6.1
GATE_D: D2.1 Q1.1 Q2.1 R10.2 | length 33.1
  Top Layer w0.5: D2.1 29.5,49.5 32.26,46.74 Q2.1 32.37,43.43 35.07,43.43 36,42.5 36,33.5 33.835,31.335 33.835,30.26 33.615,30.04 Q1.1
LOAD+: J8.P Q1.3 Q2.3
  other v2: 50.5,21 40,21.25 45,21.25 56,22 48.75,23 53,23.5 39.25,24.25 42,24.75 44.75,24.75 48.5,25.5 56.25,26 42.5,27.25 39.5,27.5 45,28 48.75,28.5 56.25,28.75 39.5,30.5 42.25,30.5 44.5,30.5 48.5,31 40.25,33.25 44.25,33.25 46.75,33.25 38.75,35 42.25,35 46,35.25 39.25,38.5 42.25,38.5 45.5,38.5 45.75,41.25 39.25,41.5 42,41.5 44,43.25 39.25,44.5 42,44.5 45.75,44.5
NetD1_1: D1.1 R1.1 | length 3.5
  Top Layer w0.5: D1.1 R1.1
NetQ3_1: Q3.1 R11.2 R12.2 | length 10
  Top Layer w0.5: R11.2 R12.2 12.7,51.1 13.55,51.95 Q3.1
NetQ3_3: Q3.3 R8.1 R10.1 | length 0.2
  Top Layer w0.5: R8.1 R8.1@16.225,48.4
NetR9_2: IC1.6 R9.2 | length 34.4
  Top Layer w0.5: R9.2 29.513,58.5 29.518,58.504 30.482,58.504 30.487,58.5 33.489,58.5 43.864,68.876 46.376,68.876 47,69.5 47,70.82 IC1.6
REF: IC1.17 J9.2 | length 28.3
  Top Layer w0.5: J9.2 5.12,84.62 8.32,87.82 IC1.17
RESET: IC1.2 J6.5 | length 41.1
  Top Layer w0.5: IC1.2 47.08,62.42 50.5,59 65,59 67.5,61.5 67.5,69.42 J6.5
RXD: IC1.1 J6.6 | length 40
  Top Layer w0.5: IC1.1 47.62,57.5 65.5,57.5 68.5,60.5 68.5,67.88 73.38,72.76 73.38,72.88 J6.6
thermoCLK: IC1.15 J3.3 J4.3 J5.3 | length 62.9
  Top Layer w0.5: J3.3 54.5,67.5 66.5,79.5 66.5,82.5 64.239,84.761 63.239,84.761 J4.3 J5.3
  Bottom Layer w0.5: IC1.15 40.9,92.9 42.064,94.064 45.722,94.064 49.554,90.233 49.554,89.071 53.625,85 J5.3
thermoCS1: IC1.11 J4.1 | length 21
  Top Layer w0.5: IC1.11 51.797,78.723 56.422,78.723 57.7,80 J4.1
thermoCS2: IC1.10 J3.1 | length 24.1
  Top Layer w0.5: IC1.10 51,76.98 51,65.125 53.625,62.5 J3.1
thermoCS3: IC1.12 J5.1 | length 12
  Top Layer w0.5: IC1.12 45.517,87.82 53.337,80 J5.1
thermoMISO: IC1.14 J3.2 J4.2 J5.2 | length 52.3
  Top Layer w0.5: IC1.14 49.411,88.729 49.411,86.714 53.625,82.5 J5.2 J4.2 63.239,82.261 64.239,82.261 65.5,81 65.5,80 61.75,76.25 55.568,76.25 52.348,73.029 52.348,66.277 53.625,65 J3.2
TXD: IC1.0 J6.7 | length 38.5
  Top Layer w0.5: IC1.0 46.58,56 65.5,56 69.5,60 69.5,66.34 J6.7
VIN: IC1.29 J6.9 | length 51.9
  Top Layer w0.5: IC1.29 32.84,54.5 67.5,54.5 70.856,57.856 70.856,62.616 J6.9
pads on no net: IC1.27 J1.1 J1.2 J7.S1 J7.S2 J8.S1 J8.S2

## Polygon pours and split planes (outlines as drawn)
BAT- on Top Layer "BAT-_L01_P000" (solid, pour order 0): 0,95 76.5,95 76.5,0 0,0
BAT- on Bottom Layer "BAT-_L02_P001" (solid, pour order 1): 0,95 76.5,95 76.5,0 0,0

## Other copper
Top Layer:
  region net BAT+: 27.5,47 28.5,46 28.5,43 30,41.5 33.5,41.5 34.5,40.5 34.5,34 33.5,33 30.5,33 29,31.5 29,29.5 29,29 30,28 33.5,28 34.5,27 34.5,20.5 33.5,19.5 15,19.5 13,21.5 13,46 14,47
  region net BAT+: 33.5,28 34.5,27 34.5,20.5 33.5,19.5 27.25,19.5 26.25,20.5 26.25,27 27.25,28
  region net BAT+: 33.5,41.5 34.5,40.5 34.5,34 33.5,33 27.25,33 26.25,34 26.25,40.5 27.25,41.5
  region net LOAD+: 38.5,47 37,45.5 37,21 38.5,19.5 56,19.5 57.5,21 57.5,30 55.5,32 50.5,32 48,34.5 48,45.5 46.5,47
  region net GATE_D: 20.5,55 21,55.5 24,55.5 24.5,55 24.5,48.5 24,48 21.5,48 20.5,49
  region net NetQ3_3: 13.5,55 14,55.5 19,55.5 20,54.5 20,50 18,48 14.5,48 14,48.5 14,49.5 15,50.5 16,50.5 17,51.5 17,52.5 16.5,53 14,53 13.5,53.5
Bottom Layer:
  region net BAT-: 13,15.5 15,17.5 60,17.5 64.5,22 64.5,26 56.5,34 52.5,34 50,36.5 50,43 51,44 59,44 60,43 61.5,41.5 73.5,41.5 75.5,39.5 75.5,10 67,1.5 15,1.5 13,3.5
  region net BAT+: 33,47 34.5,45.5 34.5,34 34.5,27.5 34.5,20.5 33.5,19.5 15,19.5 13,21.5 13,46 14,47
  region net LOAD+: 38.5,47 37,45.5 37,21 38.5,19.5 56,19.5 57.5,21 57.5,30 55.5,32 50.5,32 48,34.5 48,45.5 46.5,47

## Silkscreen, mask and mechanical layers (free items; w line width, h text height)
Top Overlay:
  text "5V" at 58,90.009 h1.2
  text "5V" at 67,89.509 h1.2
  text "GND" at 58,87.509 h1.2
  text "GND" at 67,87.009 h1.2
  text "CLK" at 58,85.008 h1.2
  text "CLK" at 67,84.508 h1.2
  text "MISO" at 58,82.509 h1.2
  text "MISO" at 67,82.009 h1.2
  text "CS3" at 58,80.009 h1.2
  text "CS1" at 67,80.009 h1.2
  text "5V" at 57.5,72.509 h1.2
  text "GND" at 57.5,70.009 h1.2
  text "CLK" at 57.5,67.508 h1.2
  text "VOLTAGE SENSE" at 1,66.757 h1
  text "MISO" at 57.5,65.009 h1.2
  text "+" at 7.25,63.435 h1.5
  text "CS2" at 57.5,62.509 h1.2
  text "-" at 7.5,60.989 h1.5
  text "OUTPUT" at 66.254,45.254 h1.2
  text "INPUT" at 4.754,31.254 h1.2
Board Shape:
  lines w0.5: 19.75,0 61.625,0 ; 19.75,0 0,0 0,95 76.5,95 76.5,69.875 76.5,58.563 76.5,38.937 76.5,0 67.5,0 61.625,0 ; 19.75,0 61.625,0 ; 61.625,0 61.625,0